# EAGLE board OLED_Adapter_15x (EAGLE 9.5.2), part 1 of 3
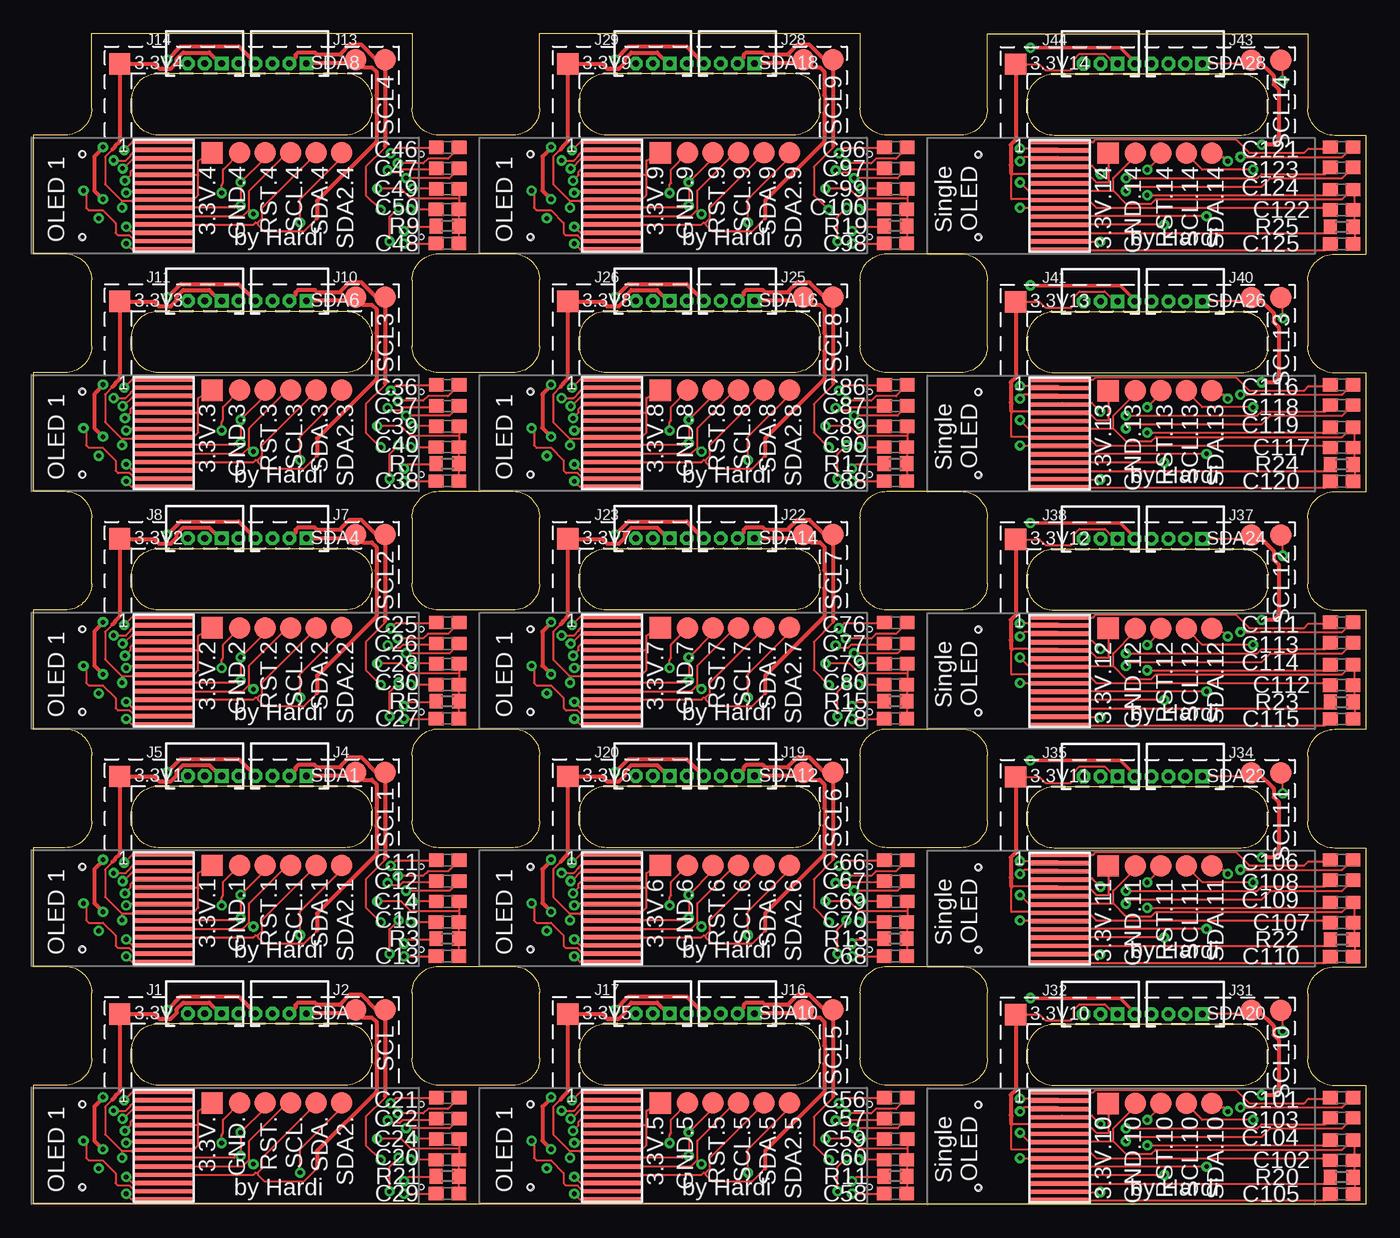
[diagram p0: board, top side]
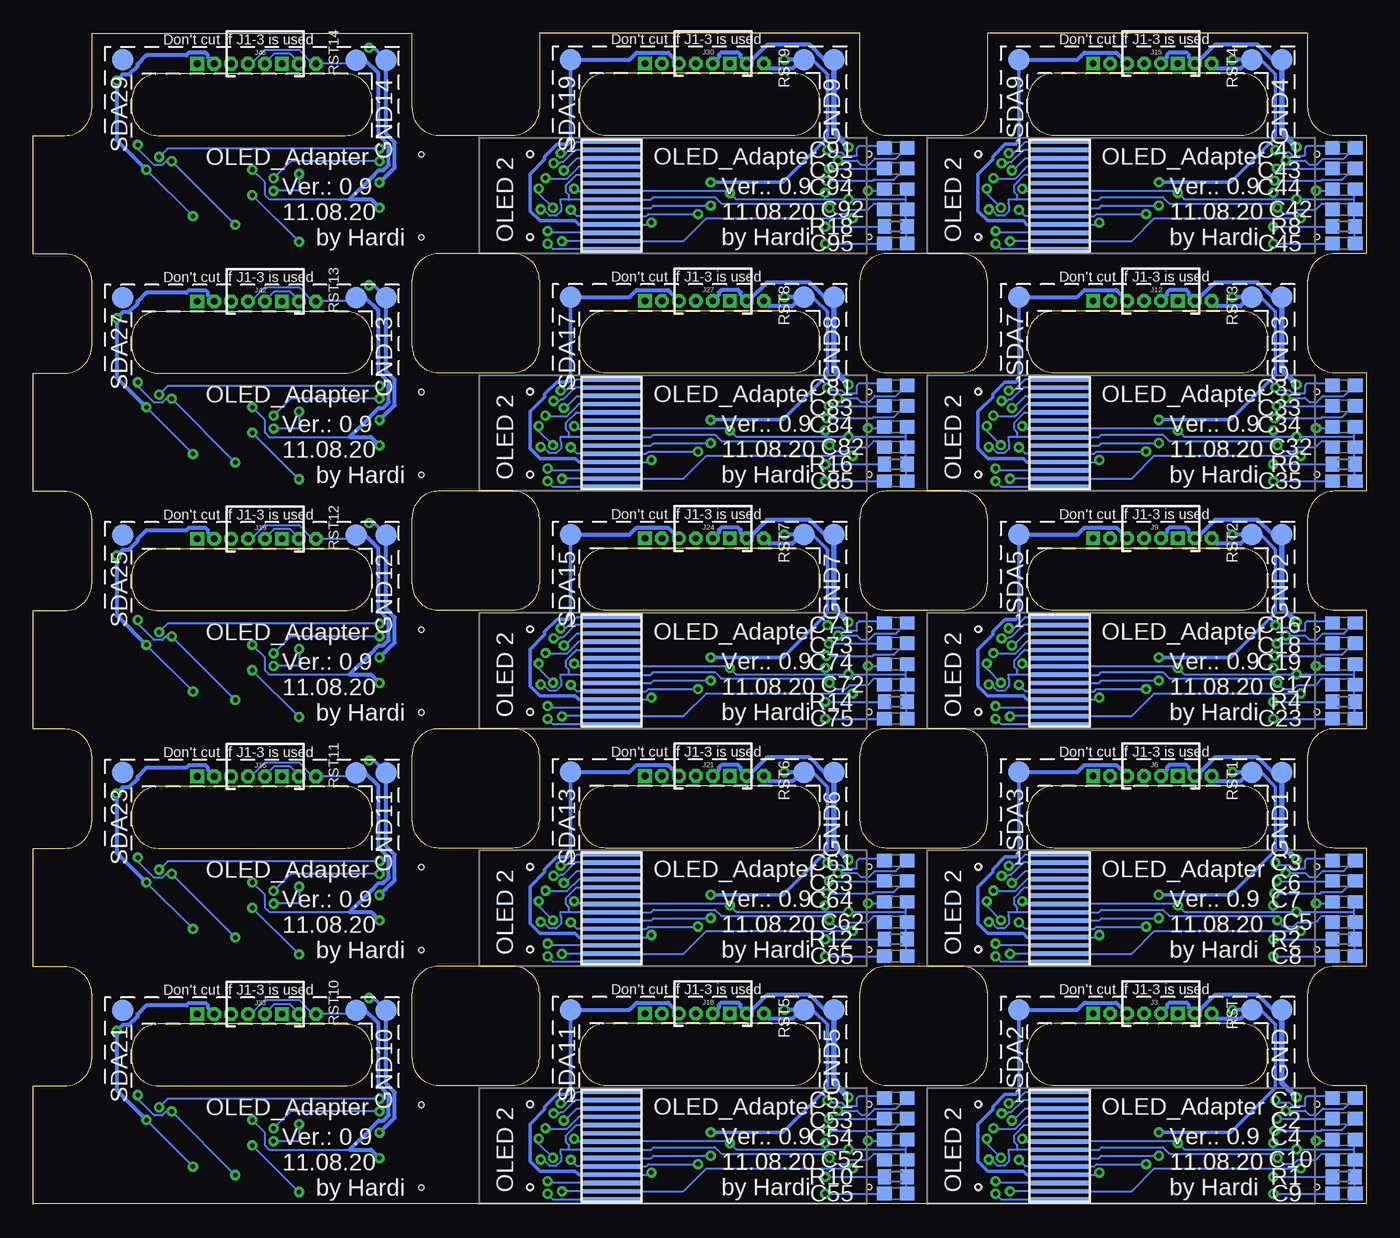
[diagram p1: board, bottom side, seen from below]

Size 99.82 x 87.7 mm. Coordinates in mm from the lower left corner, seen from the top.
Outline: 266 segments
Copper layers (1*16): Top 0.035mm / dielectric 1.5mm / Bottom 0.035mm
Design rules "default": minimum track width 6mil, minimum drill 0.35mm, track to track 6mil, track to pad 6mil, pad to pad 6mil, via to via 6mil, smd to smd 6mil, copper to edge 40mil, drill to drill 6mil, minimum pad ring 10mil, minimum via ring 8mil, stop-mask expansion 4mil, vias tented up to drill 0mil, thermal gap 10mil

## Footprints (pad centres in the part's own frame; a part is rotated, then mirrored left to right if it is on the bottom)
TP16SQ = smd 1.6 x 1.6: TP 0,0
C0603 = smd 1.1 x 1: 1 -0.85,0; 2 0.85,0
TP16R = smd 1.6 x 1.6: TP 0,0
OLED_FLEX_W_DISP = smd 4.5 x 0.32: 1 0,0; 2 0,-0.62; 3 0,-1.24; 4 0,-1.86; 5 0,-2.48; 6 0,-3.1; 7 0,-3.72; 8 0,-4.34; 9 0,-4.96; 10 0,-5.58; 11 0,-6.2; 12 0,-6.82; 13 0,-7.44; 14 0,-8.06 | hole 0.4: -6.1,-0.93; -6.1,-7.13
MINI = drill 0.5 pad 1.016 square: 1 -1.27,0 | drill 0.5 pad 1.016 octagon: 2 0,0; 3 1.27,0
R0603 = smd 1 x 1.1: 1 -0.85,0; 2 0.85,0

## Placement (x,y rotation side)
3.3V  3.3V  [TP16SQ]  6.46,14.25 0 top
3.3V1  3.3V  [TP16SQ]  6.46,32.04 0 top
3.3V2  3.3V  [TP16SQ]  6.46,49.84 0 top
3.3V3  3.3V  [TP16SQ]  6.46,67.63 0 top
3.3V4  3.3V  [TP16SQ]  6.46,85.42 0 top
3.3V5  3.3V  [TP16SQ]  40.02,14.25 0 top
3.3V6  3.3V  [TP16SQ]  40.02,32.04 0 top
3.3V7  3.3V  [TP16SQ]  40.02,49.84 0 top
3.3V8  3.3V  [TP16SQ]  40.02,67.63 0 top
3.3V9  3.3V  [TP16SQ]  40.02,85.42 0 top
3.3V10  3.3V  [TP16SQ]  73.56,14.22 0 top
3.3V11  3.3V  [TP16SQ]  73.56,32.01 0 top
3.3V12  3.3V  [TP16SQ]  73.56,49.8 0 top
3.3V13  3.3V  [TP16SQ]  73.56,67.6 0 top
3.3V14  3.3V  [TP16SQ]  73.56,85.39 0 top
3.3V.  TPTP16SQ  [TP16SQ]  13.39,7.59 0 top
3.3V.1  TPTP16SQ  [TP16SQ]  13.39,25.38 0 top
3.3V.2  TPTP16SQ  [TP16SQ]  13.39,43.18 0 top
3.3V.3  TPTP16SQ  [TP16SQ]  13.39,60.97 0 top
3.3V.4  TPTP16SQ  [TP16SQ]  13.39,78.76 0 top
3.3V.5  TPTP16SQ  [TP16SQ]  46.94,7.59 0 top
3.3V.6  TPTP16SQ  [TP16SQ]  46.94,25.38 0 top
3.3V.7  TPTP16SQ  [TP16SQ]  46.94,43.18 0 top
3.3V.8  TPTP16SQ  [TP16SQ]  46.94,60.97 0 top
3.3V.9  TPTP16SQ  [TP16SQ]  46.94,78.76 0 top
3.3V.10  TPTP16SQ  [TP16SQ]  80.48,7.56 0 top
3.3V.11  TPTP16SQ  [TP16SQ]  80.48,25.35 0 top
3.3V.12  TPTP16SQ  [TP16SQ]  80.48,43.14 0 top
3.3V.13  TPTP16SQ  [TP16SQ]  80.48,60.94 0 top
3.3V.14  TPTP16SQ  [TP16SQ]  80.48,78.73 0 top
C1  470nF  [C0603]  1.67,7.96 180 bottom
C2  470nF  [C0603]  1.67,6.43 180 bottom
C3  470nF  [C0603]  1.67,25.75 180 bottom
C4  2.2uF  [C0603]  1.67,4.86 180 bottom
C5  4.7uF  [C0603]  1.67,21.13 0 bottom
C6  470nF  [C0603]  1.67,24.23 180 bottom
C7  2.2uF  [C0603]  1.67,22.65 180 bottom
C8  4.7uF  [C0603]  1.67,18.59 0 bottom
C9  4.7uF  [C0603]  1.67,0.8 0 bottom
C10  4.7uF  [C0603]  1.67,3.34 0 bottom
C11  470nF  [C0603]  31.04,25.78 180 top
C12  470nF  [C0603]  31.04,24.21 180 top
C13  4.7uF  [C0603]  31.01,18.59 0 top
C14  2.2uF  [C0603]  31.04,22.69 180 top
C15  4.7uF  [C0603]  31.01,21.13 0 top
C16  470nF  [C0603]  1.67,43.54 180 bottom
C17  4.7uF  [C0603]  1.67,38.92 0 bottom
C18  470nF  [C0603]  1.67,42.02 180 bottom
C19  2.2uF  [C0603]  1.67,40.45 180 bottom
C20  4.7uF  [C0603]  31.01,3.34 0 top
C21  470nF  [C0603]  31.04,7.99 180 top
C22  470nF  [C0603]  31.04,6.42 180 top
C23  4.7uF  [C0603]  1.67,36.38 0 bottom
C24  2.2uF  [C0603]  31.04,4.9 180 top
C25  470nF  [C0603]  31.04,43.57 180 top
C26  470nF  [C0603]  31.04,42 180 top
C27  4.7uF  [C0603]  31.01,36.38 0 top
C28  2.2uF  [C0603]  31.04,40.48 180 top
C29  4.7uF  [C0603]  31.01,0.8 0 top
C30  4.7uF  [C0603]  31.01,38.92 0 top
C31  470nF  [C0603]  1.67,61.33 180 bottom
C32  4.7uF  [C0603]  1.67,56.71 0 bottom
C33  470nF  [C0603]  1.67,59.81 180 bottom
C34  2.2uF  [C0603]  1.67,58.24 180 bottom
C35  4.7uF  [C0603]  1.67,54.17 0 bottom
C36  470nF  [C0603]  31.04,61.36 180 top
C37  470nF  [C0603]  31.04,59.79 180 top
C38  4.7uF  [C0603]  31.01,54.17 0 top
C39  2.2uF  [C0603]  31.04,58.27 180 top
C40  4.7uF  [C0603]  31.01,56.71 0 top
C41  470nF  [C0603]  1.67,79.12 180 bottom
C42  4.7uF  [C0603]  1.67,74.5 0 bottom
C43  470nF  [C0603]  1.67,77.6 180 bottom
C44  2.2uF  [C0603]  1.67,76.03 180 bottom
C45  4.7uF  [C0603]  1.67,71.96 0 bottom
C46  470nF  [C0603]  31.04,79.16 180 top
C47  470nF  [C0603]  31.04,77.58 180 top
C48  4.7uF  [C0603]  31.01,71.96 0 top
C49  2.2uF  [C0603]  31.04,76.06 180 top
C50  4.7uF  [C0603]  31.01,74.5 0 top
C51  470nF  [C0603]  35.23,7.96 180 bottom
C52  4.7uF  [C0603]  35.23,3.34 0 bottom
C53  470nF  [C0603]  35.23,6.43 180 bottom
C54  2.2uF  [C0603]  35.23,4.86 180 bottom
C55  4.7uF  [C0603]  35.23,0.8 0 bottom
C56  470nF  [C0603]  64.6,7.99 180 top
C57  470nF  [C0603]  64.6,6.42 180 top
C58  4.7uF  [C0603]  64.57,0.8 0 top
C59  2.2uF  [C0603]  64.6,4.9 180 top
C60  4.7uF  [C0603]  64.57,3.34 0 top
C61  470nF  [C0603]  35.23,25.75 180 bottom
C62  4.7uF  [C0603]  35.23,21.13 0 bottom
C63  470nF  [C0603]  35.23,24.23 180 bottom
C64  2.2uF  [C0603]  35.23,22.65 180 bottom
C65  4.7uF  [C0603]  35.23,18.59 0 bottom
C66  470nF  [C0603]  64.6,25.78 180 top
C67  470nF  [C0603]  64.6,24.21 180 top
C68  4.7uF  [C0603]  64.57,18.59 0 top
C69  2.2uF  [C0603]  64.6,22.69 180 top
C70  4.7uF  [C0603]  64.57,21.13 0 top
C71  470nF  [C0603]  35.23,43.54 180 bottom
C72  4.7uF  [C0603]  35.23,38.92 0 bottom
C73  470nF  [C0603]  35.23,42.02 180 bottom
C74  2.2uF  [C0603]  35.23,40.45 180 bottom
C75  4.7uF  [C0603]  35.23,36.38 0 bottom
C76  470nF  [C0603]  64.6,43.57 180 top
C77  470nF  [C0603]  64.6,42 180 top
C78  4.7uF  [C0603]  64.57,36.38 0 top
C79  2.2uF  [C0603]  64.6,40.48 180 top
C80  4.7uF  [C0603]  64.57,38.92 0 top
C81  470nF  [C0603]  35.23,61.33 180 bottom
C82  4.7uF  [C0603]  35.23,56.71 0 bottom
C83  470nF  [C0603]  35.23,59.81 180 bottom
C84  2.2uF  [C0603]  35.23,58.24 180 bottom
C85  4.7uF  [C0603]  35.23,54.17 0 bottom
C86  470nF  [C0603]  64.6,61.36 180 top
C87  470nF  [C0603]  64.6,59.79 180 top
C88  4.7uF  [C0603]  64.57,54.17 0 top
C89  2.2uF  [C0603]  64.6,58.27 180 top
C90  4.7uF  [C0603]  64.57,56.71 0 top
C91  470nF  [C0603]  35.23,79.12 180 bottom
C92  4.7uF  [C0603]  35.23,74.5 0 bottom
C93  470nF  [C0603]  35.23,77.6 180 bottom
C94  2.2uF  [C0603]  35.23,76.03 180 bottom
C95  4.7uF  [C0603]  35.23,71.96 0 bottom
C96  470nF  [C0603]  64.6,79.16 180 top
C97  470nF  [C0603]  64.6,77.58 180 top
C98  4.7uF  [C0603]  64.57,71.96 0 top
C99  2.2uF  [C0603]  64.6,76.06 180 top
C100  4.7uF  [C0603]  64.57,74.5 0 top
C101  470nF  [C0603]  97.98,8 180 top
C102  4.7uF  [C0603]  97.98,3.3 0 top
C103  470nF  [C0603]  97.98,6.48 180 top
C104  2.2uF  [C0603]  97.98,4.83 180 top
C105  4.7uF  [C0603]  97.98,0.76 0 top
C106  470nF  [C0603]  97.98,25.79 180 top
C107  4.7uF  [C0603]  97.98,21.1 0 top
C108  470nF  [C0603]  97.98,24.27 180 top
C109  2.2uF  [C0603]  97.98,22.62 180 top
C110  4.7uF  [C0603]  97.98,18.56 0 top
C111  470nF  [C0603]  97.98,43.59 180 top
C112  4.7uF  [C0603]  97.98,38.89 0 top
C113  470nF  [C0603]  97.98,42.06 180 top
C114  2.2uF  [C0603]  97.98,40.41 180 top
C115  4.7uF  [C0603]  97.98,36.35 0 top
C116  470nF  [C0603]  97.98,61.38 180 top
C117  4.7uF  [C0603]  97.98,56.68 0 top
C118  470nF  [C0603]  97.98,59.86 180 top
C119  2.2uF  [C0603]  97.98,58.21 180 top
C120  4.7uF  [C0603]  97.98,54.14 0 top
C121  470nF  [C0603]  97.98,79.17 180 top
C122  4.7uF  [C0603]  97.98,74.48 0 top
C123  470nF  [C0603]  97.98,77.65 180 top
C124  2.2uF  [C0603]  97.98,76 180 top
C125  4.7uF  [C0603]  97.98,71.94 0 top
GND  GND  [TP16R]  6.3,14.57 0 bottom
GND1  GND  [TP16R]  6.3,32.36 0 bottom
GND2  GND  [TP16R]  6.3,50.15 0 bottom
GND3  GND  [TP16R]  6.3,67.95 0 bottom
GND4  GND  [TP16R]  6.3,85.74 0 bottom
GND5  GND  [TP16R]  39.86,14.57 0 bottom
GND6  GND  [TP16R]  39.86,32.36 0 bottom
GND7  GND  [TP16R]  39.86,50.15 0 bottom
GND8  GND  [TP16R]  39.86,67.95 0 bottom
GND9  GND  [TP16R]  39.86,85.74 0 bottom
GND10  GND  [TP16R]  73.4,14.53 0 bottom
GND11  GND  [TP16R]  73.4,32.33 0 bottom
GND12  GND  [TP16R]  73.4,50.12 0 bottom
GND13  GND  [TP16R]  73.4,67.91 0 bottom
GND14  GND  [TP16R]  73.4,85.71 0 bottom
GND.  TPTP16R  [TP16R]  15.45,7.59 0 top
GND.1  TPTP16R  [TP16R]  15.45,25.38 0 top
GND.2  TPTP16R  [TP16R]  15.45,43.18 0 top
GND.3  TPTP16R  [TP16R]  15.45,60.97 0 top
GND.4  TPTP16R  [TP16R]  15.45,78.76 0 top
GND.5  TPTP16R  [TP16R]  49.01,7.59 0 top
GND.6  TPTP16R  [TP16R]  49.01,25.38 0 top
GND.7  TPTP16R  [TP16R]  49.01,43.18 0 top
GND.8  TPTP16R  [TP16R]  49.01,60.97 0 top
GND.9  TPTP16R  [TP16R]  49.01,78.76 0 top
GND.10  TPTP16R  [TP16R]  82.55,7.56 0 top
GND.11  TPTP16R  [TP16R]  82.55,25.35 0 top
GND.12  TPTP16R  [TP16R]  82.55,43.14 0 top
GND.13  TPTP16R  [TP16R]  82.55,60.94 0 top
GND.14  TPTP16R  [TP16R]  82.55,78.73 0 top
IC1  OLED_FLEXW_DISP  [OLED_FLEX_W_DISP]  9.77,8.42 0 top
IC2  OLED_FLEXW_DISP  [OLED_FLEX_W_DISP]  22.95,8.42 0 bottom
IC3  OLED_FLEXW_DISP  [OLED_FLEX_W_DISP]  9.77,26.21 0 top
IC4  OLED_FLEXW_DISP  [OLED_FLEX_W_DISP]  22.95,26.21 0 bottom
IC5  OLED_FLEXW_DISP  [OLED_FLEX_W_DISP]  9.77,44 0 top
IC6  OLED_FLEXW_DISP  [OLED_FLEX_W_DISP]  22.95,44 0 bottom
IC7  OLED_FLEXW_DISP  [OLED_FLEX_W_DISP]  9.77,61.79 0 top
IC8  OLED_FLEXW_DISP  [OLED_FLEX_W_DISP]  22.95,61.79 0 bottom
IC9  OLED_FLEXW_DISP  [OLED_FLEX_W_DISP]  9.77,79.58 0 top
IC10  OLED_FLEXW_DISP  [OLED_FLEX_W_DISP]  22.95,79.58 0 bottom
IC11  OLED_FLEXW_DISP  [OLED_FLEX_W_DISP]  43.32,8.42 0 top
IC12  OLED_FLEXW_DISP  [OLED_FLEX_W_DISP]  56.51,8.42 0 bottom
IC13  OLED_FLEXW_DISP  [OLED_FLEX_W_DISP]  43.32,26.21 0 top
IC14  OLED_FLEXW_DISP  [OLED_FLEX_W_DISP]  56.51,26.21 0 bottom
IC15  OLED_FLEXW_DISP  [OLED_FLEX_W_DISP]  43.32,44 0 top
IC16  OLED_FLEXW_DISP  [OLED_FLEX_W_DISP]  56.51,44 0 bottom
IC17  OLED_FLEXW_DISP  [OLED_FLEX_W_DISP]  43.32,61.79 0 top
IC18  OLED_FLEXW_DISP  [OLED_FLEX_W_DISP]  56.51,61.79 0 bottom
IC19  OLED_FLEXW_DISP  [OLED_FLEX_W_DISP]  43.32,79.58 0 top
IC20  OLED_FLEXW_DISP  [OLED_FLEX_W_DISP]  56.51,79.58 0 bottom
IC21  OLED_FLEXW_DISP  [OLED_FLEX_W_DISP]  76.86,8.38 0 top
IC22  OLED_FLEXW_DISP  [OLED_FLEX_W_DISP]  76.86,26.18 0 top
IC23  OLED_FLEXW_DISP  [OLED_FLEX_W_DISP]  76.86,43.97 0 top
IC24  OLED_FLEXW_DISP  [OLED_FLEX_W_DISP]  76.86,61.76 0 top
IC25  OLED_FLEXW_DISP  [OLED_FLEX_W_DISP]  76.86,79.56 0 top
J1  SV3  [MINI]  12.83,14.29 180 top
J2  SV3  [MINI]  19.18,14.29 180 top
J3  SV3  [MINI]  15.37,14.29 180 bottom
J4  SV3  [MINI]  19.18,32.08 180 top
J5  SV3  [MINI]  12.83,32.08 180 top
J6  SV3  [MINI]  15.37,32.08 180 bottom
J7  SV3  [MINI]  19.18,49.88 180 top
J8  SV3  [MINI]  12.83,49.88 180 top
J9  SV3  [MINI]  15.37,49.88 180 bottom
J10  SV3  [MINI]  19.18,67.67 180 top
J11  SV3  [MINI]  12.83,67.67 180 top
J12  SV3  [MINI]  15.37,67.67 180 bottom
J13  SV3  [MINI]  19.18,85.46 180 top
J14  SV3  [MINI]  12.83,85.46 180 top
J15  SV3  [MINI]  15.37,85.46 180 bottom
J16  SV3  [MINI]  52.74,14.29 180 top
J17  SV3  [MINI]  46.39,14.29 180 top
J18  SV3  [MINI]  48.93,14.29 180 bottom
J19  SV3  [MINI]  52.74,32.08 180 top
J20  SV3  [MINI]  46.39,32.08 180 top
J21  SV3  [MINI]  48.93,32.08 180 bottom
J22  SV3  [MINI]  52.74,49.88 180 top
J23  SV3  [MINI]  46.39,49.88 180 top
J24  SV3  [MINI]  48.93,49.88 180 bottom
J25  SV3  [MINI]  52.74,67.67 180 top
J26  SV3  [MINI]  46.39,67.67 180 top
J27  SV3  [MINI]  48.93,67.67 180 bottom
J28  SV3  [MINI]  52.74,85.46 180 top
J29  SV3  [MINI]  46.39,85.46 180 top
J30  SV3  [MINI]  48.93,85.46 180 bottom
J31  SV3  [MINI]  86.28,14.26 180 top
J32  SV3  [MINI]  79.93,14.26 180 top
J33  SV3  [MINI]  82.47,14.26 180 bottom
J34  SV3  [MINI]  86.28,32.05 180 top
J35  SV3  [MINI]  79.93,32.05 180 top
J36  SV3  [MINI]  82.47,32.05 180 bottom
J37  SV3  [MINI]  86.28,49.84 180 top
J38  SV3  [MINI]  79.93,49.84 180 top
J39  SV3  [MINI]  82.47,49.84 180 bottom
J40  SV3  [MINI]  86.28,67.64 180 top
J41  SV3  [MINI]  79.93,67.64 180 top
J42  SV3  [MINI]  82.47,67.64 180 bottom
J43  SV3  [MINI]  86.28,85.43 180 top
J44  SV3  [MINI]  79.93,85.43 180 top
J45  SV3  [MINI]  82.47,85.43 180 bottom
R1  560K  [R0603]  1.67,2.07 180 bottom
R2  560K  [R0603]  1.67,19.86 180 bottom
R3  560K  [R0603]  31.01,19.89 180 top
R4  560K  [R0603]  1.67,37.65 180 bottom
R5  560K  [R0603]  31.01,37.68 180 top
R6  560K  [R0603]  1.67,55.44 180 bottom
R7  560K  [R0603]  31.01,55.48 180 top
R8  560K  [R0603]  1.67,73.23 180 bottom
R9  560K  [R0603]  31.01,73.27 180 top
R10  560K  [R0603]  35.23,2.07 180 bottom
R11  560K  [R0603]  64.57,2.1 180 top
R12  560K  [R0603]  35.23,19.86 180 bottom
R13  560K  [R0603]  64.57,19.89 180 top
R14  560K  [R0603]  35.23,37.65 180 bottom
R15  560K  [R0603]  64.57,37.68 180 top
R16  560K  [R0603]  35.23,55.44 180 bottom
R17  560K  [R0603]  64.57,55.48 180 top
R18  560K  [R0603]  35.23,73.23 180 bottom
R19  560K  [R0603]  64.57,73.27 180 top
R20  560K  [R0603]  97.98,2.03 180 top
R21  560K  [R0603]  31.01,2.1 180 top
R22  560K  [R0603]  97.98,19.83 180 top
R23  560K  [R0603]  97.98,37.62 180 top
R24  560K  [R0603]  97.98,55.41 180 top
R25  560K  [R0603]  97.98,73.21 180 top
RST  RST  [TP16R]  8.56,14.57 0 bottom
RST1  RST  [TP16R]  8.56,32.36 0 bottom
RST2  RST  [TP16R]  8.56,50.15 0 bottom
RST3  RST  [TP16R]  8.56,67.95 0 bottom
RST4  RST  [TP16R]  8.56,85.74 0 bottom
RST5  RST  [TP16R]  42.12,14.57 0 bottom
RST6  RST  [TP16R]  42.12,32.36 0 bottom
RST7  RST  [TP16R]  42.12,50.15 0 bottom
RST8  RST  [TP16R]  42.12,67.95 0 bottom
RST9  RST  [TP16R]  42.12,85.74 0 bottom
RST10  RST  [TP16R]  75.66,14.53 0 bottom
RST11  RST  [TP16R]  75.66,32.33 0 bottom
RST12  RST  [TP16R]  75.66,50.12 0 bottom
RST13  RST  [TP16R]  75.66,67.91 0 bottom
RST14  RST  [TP16R]  75.66,85.71 0 bottom
RST.  TPTP16R  [TP16R]  17.35,7.59 0 top
RST.1  TPTP16R  [TP16R]  17.35,25.38 0 top
RST.2  TPTP16R  [TP16R]  17.35,43.18 0 top
RST.3  TPTP16R  [TP16R]  17.35,60.97 0 top
RST.4  TPTP16R  [TP16R]  17.35,78.76 0 top
RST.5  TPTP16R  [TP16R]  50.91,7.59 0 top
RST.6  TPTP16R  [TP16R]  50.91,25.38 0 top
RST.7  TPTP16R  [TP16R]  50.91,43.18 0 top
RST.8  TPTP16R  [TP16R]  50.91,60.97 0 top
RST.9  TPTP16R  [TP16R]  50.91,78.76 0 top
RST.10  TPTP16R  [TP16R]  84.45,7.56 0 top
RST.11  TPTP16R  [TP16R]  84.45,25.35 0 top
RST.12  TPTP16R  [TP16R]  84.45,43.14 0 top
RST.13  TPTP16R  [TP16R]  84.45,60.94 0 top
RST.14  TPTP16R  [TP16R]  84.45,78.73 0 top
SCL  SCL  [TP16R]  26.34,14.57 0 top
SCL1  SCL  [TP16R]  26.34,32.36 0 top
SCL2  SCL  [TP16R]  26.34,50.15 0 top
SCL3  SCL  [TP16R]  26.34,67.95 0 top
SCL4  SCL  [TP16R]  26.34,85.74 0 top
SCL5  SCL  [TP16R]  59.9,14.57 0 top
SCL6  SCL  [TP16R]  59.9,32.36 0 top
SCL7  SCL  [TP16R]  59.9,50.15 0 top
SCL8  SCL  [TP16R]  59.9,67.95 0 top
SCL9  SCL  [TP16R]  59.9,85.74 0 top
SCL10  SCL  [TP16R]  93.44,14.53 0 top
SCL11  SCL  [TP16R]  93.44,32.33 0 top
SCL12  SCL  [TP16R]  93.44,50.12 0 top
SCL13  SCL  [TP16R]  93.44,67.91 0 top
SCL14  SCL  [TP16R]  93.44,85.71 0 top
SCL.  TPTP16R  [TP16R]  19.26,7.59 0 top
SCL.1  TPTP16R  [TP16R]  19.26,25.38 0 top
SCL.2  TPTP16R  [TP16R]  19.26,43.18 0 top
SCL.3  TPTP16R  [TP16R]  19.26,60.97 0 top
SCL.4  TPTP16R  [TP16R]  19.26,78.76 0 top
SCL.5  TPTP16R  [TP16R]  52.81,7.59 0 top
SCL.6  TPTP16R  [TP16R]  52.81,25.38 0 top
SCL.7  TPTP16R  [TP16R]  52.81,43.18 0 top
SCL.8  TPTP16R  [TP16R]  52.81,60.97 0 top
SCL.9  TPTP16R  [TP16R]  52.81,78.76 0 top
SCL.10  TPTP16R  [TP16R]  86.35,7.56 0 top
SCL.11  TPTP16R  [TP16R]  86.35,25.35 0 top
SCL.12  TPTP16R  [TP16R]  86.35,43.14 0 top
SCL.13  TPTP16R  [TP16R]  86.35,60.94 0 top
SCL.14  TPTP16R  [TP16R]  86.35,78.73 0 top
SDA  SDA  [TP16R]  24.12,14.57 0 top
SDA1  SDA  [TP16R]  24.12,32.36 0 top
SDA2  SDA2  [TP16R]  26.02,14.58 0 bottom
SDA2.  TPTP16R  [TP16R]  23.08,7.61 0 top
SDA2.1  TPTP16R  [TP16R]  23.08,25.4 0 top
SDA2.2  TPTP16R  [TP16R]  23.08,43.19 0 top
SDA2.3  TPTP16R  [TP16R]  23.08,60.98 0 top
SDA2.4  TPTP16R  [TP16R]  23.08,78.77 0 top
SDA2.5  TPTP16R  [TP16R]  56.64,7.61 0 top
SDA2.6  TPTP16R  [TP16R]  56.64,25.4 0 top
SDA2.7  TPTP16R  [TP16R]  56.64,43.19 0 top
SDA2.8  TPTP16R  [TP16R]  56.64,60.98 0 top
SDA2.9  TPTP16R  [TP16R]  56.64,78.77 0 top
SDA3  SDA2  [TP16R]  26.02,32.37 0 bottom
SDA4  SDA  [TP16R]  24.12,50.15 0 top
SDA5  SDA2  [TP16R]  26.02,50.16 0 bottom
SDA6  SDA  [TP16R]  24.12,67.95 0 top
SDA7  SDA2  [TP16R]  26.02,67.95 0 bottom
SDA8  SDA  [TP16R]  24.12,85.74 0 top
SDA9  SDA2  [TP16R]  26.02,85.74 0 bottom
SDA10  SDA  [TP16R]  57.68,14.57 0 top
SDA11  SDA2  [TP16R]  59.58,14.58 0 bottom
SDA12  SDA  [TP16R]  57.68,32.36 0 top
SDA13  SDA2  [TP16R]  59.58,32.37 0 bottom
SDA14  SDA  [TP16R]  57.68,50.15 0 top
SDA15  SDA2  [TP16R]  59.58,50.16 0 bottom
SDA16  SDA  [TP16R]  57.68,67.95 0 top
SDA17  SDA2  [TP16R]  59.58,67.95 0 bottom
SDA18  SDA  [TP16R]  57.68,85.74 0 top
SDA19  SDA2  [TP16R]  59.58,85.74 0 bottom
SDA20  SDA  [TP16R]  91.21,14.53 0 top
SDA21  SDA2  [TP16R]  93.12,14.54 0 bottom
SDA22  SDA  [TP16R]  91.21,32.33 0 top
SDA23  SDA2  [TP16R]  93.12,32.34 0 bottom
SDA24  SDA  [TP16R]  91.21,50.12 0 top
SDA25  SDA2  [TP16R]  93.12,50.13 0 bottom
SDA26  SDA  [TP16R]  91.21,67.91 0 top
SDA27  SDA2  [TP16R]  93.12,67.92 0 bottom
SDA28  SDA  [TP16R]  91.21,85.71 0 top
SDA29  SDA2  [TP16R]  93.12,85.72 0 bottom
SDA.  TPTP16R  [TP16R]  21.16,7.59 0 top
SDA.1  TPTP16R  [TP16R]  21.16,25.38 0 top
SDA.2  TPTP16R  [TP16R]  21.16,43.18 0 top
SDA.3  TPTP16R  [TP16R]  21.16,60.97 0 top
SDA.4  TPTP16R  [TP16R]  21.16,78.76 0 top
SDA.5  TPTP16R  [TP16R]  54.72,7.59 0 top
SDA.6  TPTP16R  [TP16R]  54.72,25.38 0 top
SDA.7  TPTP16R  [TP16R]  54.72,43.18 0 top
SDA.8  TPTP16R  [TP16R]  54.72,60.97 0 top
SDA.9  TPTP16R  [TP16R]  54.72,78.76 0 top
SDA.10  TPTP16R  [TP16R]  88.26,7.56 0 top
SDA.11  TPTP16R  [TP16R]  88.26,25.35 0 top
SDA.12  TPTP16R  [TP16R]  88.26,43.14 0 top
SDA.13  TPTP16R  [TP16R]  88.26,60.94 0 top
SDA.14  TPTP16R  [TP16R]  88.26,78.73 0 top

## Library data of the parts
3.3V 3.3V1-3.3V14 3.3V. 3.3V.1-3.3V.14 GND GND1-GND14 GND. GND.1-GND.14 RST RST1-RST14 RST. RST.1-RST.14 SCL SCL1-SCL14 SCL. SCL.1-SCL.14 SDA SDA1 SDA2 SDA2. SDA2.1-SDA2.9 SDA3-SDA29 SDA. SDA.1-SDA.14 = testpad
C1-C125 = resistor
IC1-IC25 = OLED_Flex
J1-J45 = SparkFun-Connectors
R1-R25 = rcl; SPICEPREFIX: R

## Nets
3.3V: 3.3V..TP 3.3V.TP C10.1 C20.1 IC1.5 IC1.8 IC2.5 IC2.8 J1.1 J3.1
3.3V1: 3.3V1.TP 3.3V.1.TP C5.1 C15.1 IC3.5 IC3.8 IC4.5 IC4.8 J5.1 J6.1
3.3V2: 3.3V2.TP 3.3V.2.TP C17.1 C30.1 IC5.5 IC5.8 IC6.5 IC6.8 J8.1 J9.1
3.3V3: 3.3V3.TP 3.3V.3.TP C32.1 C40.1 IC7.5 IC7.8 IC8.5 IC8.8 J11.1 J12.1
3.3V4: 3.3V4.TP 3.3V.4.TP C42.1 C50.1 IC9.5 IC9.8 IC10.5 IC10.8 J14.1 J15.1
3.3V5: 3.3V5.TP 3.3V.5.TP C52.1 C60.1 IC11.5 IC11.8 IC12.5 IC12.8 J17.1 J18.1
3.3V6: 3.3V6.TP 3.3V.6.TP C62.1 C70.1 IC13.5 IC13.8 IC14.5 IC14.8 J20.1 J21.1
3.3V7: 3.3V7.TP 3.3V.7.TP C72.1 C80.1 IC15.5 IC15.8 IC16.5 IC16.8 J23.1 J24.1
3.3V8: 3.3V8.TP 3.3V.8.TP C82.1 C90.1 IC17.5 IC17.8 IC18.5 IC18.8 J26.1 J27.1
3.3V9: 3.3V9.TP 3.3V.9.TP C92.1 C100.1 IC19.5 IC19.8 IC20.5 IC20.8 J29.1 J30.1
3.3V10: 3.3V10.TP 3.3V.10.TP C102.1 IC21.5 IC21.8 J32.1 J33.1
3.3V11: 3.3V11.TP 3.3V.11.TP C107.1 IC22.5 IC22.8 J35.1 J36.1
3.3V12: 3.3V12.TP 3.3V.12.TP C112.1 IC23.5 IC23.8 J38.1 J39.1
3.3V13: 3.3V13.TP 3.3V.13.TP C117.1 IC24.5 IC24.8 J41.1 J42.1
3.3V14: 3.3V14.TP 3.3V.14.TP C122.1 IC25.5 IC25.8 J44.1 J45.1
GND: C4.1 C9.2 C10.2 C20.2 C24.1 C29.2 GND..TP GND.TP IC1.7 IC2.7 J1.2 J3.2 R1.1 R21.1
GND1: C5.2 C7.1 C8.2 C13.2 C14.1 C15.2 GND1.TP GND.1.TP IC3.7 IC4.7 J5.2 J6.2 R2.1 R3.1
GND2: C17.2 C19.1 C23.2 C27.2 C28.1 C30.2 GND2.TP GND.2.TP IC5.7 IC6.7 J8.2 J9.2 R4.1 R5.1
GND3: C32.2 C34.1 C35.2 C38.2 C39.1 C40.2 GND3.TP GND.3.TP IC7.7 IC8.7 J11.2 J12.2 R6.1 R7.1
GND4: C42.2 C44.1 C45.2 C48.2 C49.1 C50.2 GND4.TP GND.4.TP IC9.7 IC10.7 J14.2 J15.2 R8.1 R9.1
GND5: C52.2 C54.1 C55.2 C58.2 C59.1 C60.2 GND5.TP GND.5.TP IC11.7 IC12.7 J17.2 J18.2 R10.1 R11.1
GND6: C62.2 C64.1 C65.2 C68.2 C69.1 C70.2 GND6.TP GND.6.TP IC13.7 IC14.7 J20.2 J21.2 R12.1 R13.1
GND7: C72.2 C74.1 C75.2 C78.2 C79.1 C80.2 GND7.TP GND.7.TP IC15.7 IC16.7 J23.2 J24.2 R14.1 R15.1
GND8: C82.2 C84.1 C85.2 C88.2 C89.1 C90.2 GND8.TP GND.8.TP IC17.7 IC18.7 J26.2 J27.2 R16.1 R17.1
GND9: C92.2 C94.1 C95.2 C98.2 C99.1 C100.2 GND9.TP GND.9.TP IC19.7 IC20.7 J29.2 J30.2 R18.1 R19.1
GND10: C102.2 C104.1 C105.2 GND10.TP GND.10.TP IC21.7 J32.2 J33.2 R20.1
GND11: C107.2 C109.1 C110.2 GND11.TP GND.11.TP IC22.7 J35.2 J36.2 R22.1
GND12: C112.2 C114.1 C115.2 GND12.TP GND.12.TP IC23.7 J38.2 J39.2 R23.1
GND13: C117.2 C119.1 C120.2 GND13.TP GND.13.TP IC24.7 J41.2 J42.2 R24.1
GND14: C122.2 C124.1 C125.2 GND14.TP GND.14.TP IC25.7 J44.2 J45.2 R25.1
N$1: IC1.12 R1.2
N$2: C21.2 IC2.1
N$3: C1.2 IC1.1
N$4: C1.1 IC1.2
N$5: C2.2 IC1.3
N$6: C2.1 IC1.4
N$7: C9.1 IC1.14
N$8: C4.2 IC1.13
N$9: C21.1 IC2.2
N$10: C22.2 IC2.3
N$11: C22.1 IC2.4
N$12: IC2.12 R21.2
N$13: C29.1 IC2.14
N$14: C24.2 IC2.13
N$15: C3.2 IC3.1
N$16: C3.1 IC3.2
N$17: C6.2 IC3.3
N$18: C6.1 IC3.4
N$19: IC3.12 R2.2
N$20: C8.1 IC3.14
N$21: C7.2 IC3.13
N$22: C11.2 IC4.1
N$23: C11.1 IC4.2
N$24: C12.2 IC4.3
N$25: C12.1 IC4.4
N$26: IC4.12 R3.2
N$27: C13.1 IC4.14
N$28: C14.2 IC4.13
N$29: C16.2 IC5.1
N$30: C16.1 IC5.2
N$31: C18.2 IC5.3
N$32: C18.1 IC5.4
N$33: IC5.12 R4.2
N$34: C23.1 IC5.14
N$35: C19.2 IC5.13
N$36: C25.2 IC6.1
N$37: C25.1 IC6.2
N$38: C26.2 IC6.3
N$39: C26.1 IC6.4
N$40: IC6.12 R5.2
N$41: C27.1 IC6.14
N$42: C28.2 IC6.13
N$43: C31.2 IC7.1
N$44: C31.1 IC7.2
N$45: C33.2 IC7.3
N$46: C33.1 IC7.4
N$47: IC7.12 R6.2
N$48: C35.1 IC7.14
N$49: C34.2 IC7.13
N$50: C36.2 IC8.1
N$51: C36.1 IC8.2
N$52: C37.2 IC8.3
N$53: C37.1 IC8.4
N$54: IC8.12 R7.2
N$55: C38.1 IC8.14
N$56: C39.2 IC8.13
N$57: C41.2 IC9.1
N$58: C41.1 IC9.2
N$59: C43.2 IC9.3
N$60: C43.1 IC9.4
N$61: IC9.12 R8.2
N$62: C45.1 IC9.14
N$63: C44.2 IC9.13
N$64: C46.2 IC10.1
N$65: C46.1 IC10.2
N$66: C47.2 IC10.3
N$67: C47.1 IC10.4
N$68: IC10.12 R9.2
N$69: C48.1 IC10.14
N$70: C49.2 IC10.13
N$71: C51.2 IC11.1
N$72: C51.1 IC11.2
N$73: C53.2 IC11.3
N$74: C53.1 IC11.4
N$75: IC11.12 R10.2
N$76: C55.1 IC11.14
N$77: C54.2 IC11.13
N$78: C56.2 IC12.1
N$79: C56.1 IC12.2
N$80: C57.2 IC12.3
N$81: C57.1 IC12.4
N$82: IC12.12 R11.2
N$83: C58.1 IC12.14
N$84: C59.2 IC12.13
N$85: C61.2 IC13.1
N$86: C61.1 IC13.2
N$87: C63.2 IC13.3
N$88: C63.1 IC13.4
N$89: IC13.12 R12.2
N$90: C65.1 IC13.14
N$91: C64.2 IC13.13
N$92: C66.2 IC14.1
N$93: C66.1 IC14.2
N$94: C67.2 IC14.3
N$95: C67.1 IC14.4
N$96: IC14.12 R13.2
N$97: C68.1 IC14.14
N$98: C69.2 IC14.13
N$99: C71.2 IC15.1
N$100: C71.1 IC15.2
N$101: C73.2 IC15.3
N$102: C73.1 IC15.4
N$103: IC15.12 R14.2
N$104: C75.1 IC15.14
N$105: C74.2 IC15.13
N$106: C76.2 IC16.1
N$107: C76.1 IC16.2
N$108: C77.2 IC16.3
N$109: C77.1 IC16.4
N$110: IC16.12 R15.2
N$111: C78.1 IC16.14
N$112: C79.2 IC16.13
N$113: C81.2 IC17.1
N$114: C81.1 IC17.2
N$115: C83.2 IC17.3
N$116: C83.1 IC17.4
N$117: IC17.12 R16.2
N$118: C85.1 IC17.14
N$119: C84.2 IC17.13
N$120: C86.2 IC18.1
N$121: C86.1 IC18.2
N$122: C87.2 IC18.3
N$123: C87.1 IC18.4
N$124: IC18.12 R17.2
N$125: C88.1 IC18.14
N$126: C89.2 IC18.13
N$127: C91.2 IC19.1
N$128: C91.1 IC19.2
N$129: C93.2 IC19.3
N$130: C93.1 IC19.4
N$131: IC19.12 R18.2
N$132: C95.1 IC19.14
N$133: C94.2 IC19.13
N$134: C96.2 IC20.1
N$135: C96.1 IC20.2
N$136: C97.2 IC20.3
N$137: C97.1 IC20.4
N$138: IC20.12 R19.2
N$139: C98.1 IC20.14
N$140: C99.2 IC20.13
N$141: C101.2 IC21.1
N$142: C101.1 IC21.2
N$143: C103.2 IC21.3
N$144: C103.1 IC21.4
N$145: IC21.12 R20.2
N$146: C105.1 IC21.14
N$147: C104.2 IC21.13
N$148: C106.2 IC22.1
N$149: C106.1 IC22.2
N$150: C108.2 IC22.3
N$151: C108.1 IC22.4
N$152: IC22.12 R22.2
N$153: C110.1 IC22.14
N$154: C109.2 IC22.13
N$155: C111.2 IC23.1
N$156: C111.1 IC23.2
N$157: C113.2 IC23.3
N$158: C113.1 IC23.4
N$159: IC23.12 R23.2
N$160: C115.1 IC23.14
N$161: C114.2 IC23.13
N$162: C116.2 IC24.1
N$163: C116.1 IC24.2
N$164: C118.2 IC24.3
N$165: C118.1 IC24.4
N$166: IC24.12 R24.2
N$167: C120.1 IC24.14
N$168: C119.2 IC24.13
N$169: C121.2 IC25.1
N$170: C121.1 IC25.2
N$171: C123.2 IC25.3
N$172: C123.1 IC25.4
N$173: IC25.12 R25.2
N$174: C125.1 IC25.14
N$175: C124.2 IC25.13
RES#: IC1.9 IC2.9 J1.3 J3.3 RST..TP RST.TP
RES#1: IC3.9 IC4.9 J5.3 J6.3 RST1.TP RST.1.TP
RES#2: IC5.9 IC6.9 J8.3 J9.3 RST2.TP RST.2.TP
RES#3: IC7.9 IC8.9 J11.3 J12.3 RST3.TP RST.3.TP
RES#4: IC9.9 IC10.9 J14.3 J15.3 RST4.TP RST.4.TP
RES#5: IC11.9 IC12.9 J17.3 J18.3 RST5.TP RST.5.TP
RES#6: IC13.9 IC14.9 J20.3 J21.3 RST6.TP RST.6.TP
RES#7: IC15.9 IC16.9 J23.3 J24.3 RST7.TP RST.7.TP
RES#8: IC17.9 IC18.9 J26.3 J27.3 RST8.TP RST.8.TP
RES#9: IC19.9 IC20.9 J29.3 J30.3 RST9.TP RST.9.TP
RES#10: IC21.9 J32.3 J33.3 RST10.TP RST.10.TP
RES#11: IC22.9 J35.3 J36.3 RST11.TP RST.11.TP
RES#12: IC23.9 J38.3 J39.3 RST12.TP RST.12.TP
RES#13: IC24.9 J41.3 J42.3 RST13.TP RST.13.TP
RES#14: IC25.9 J44.3 J45.3 RST14.TP RST.14.TP
SCL: IC1.10 IC2.10 J2.2 SCL..TP SCL.TP
SCL1: IC3.10 IC4.10 J4.2 SCL1.TP SCL.1.TP
SCL2: IC5.10 IC6.10 J7.2 SCL2.TP SCL.2.TP
SCL3: IC7.10 IC8.10 J10.2 SCL3.TP SCL.3.TP
SCL4: IC9.10 IC10.10 J13.2 SCL4.TP SCL.4.TP
SCL5: IC11.10 IC12.10 J16.2 SCL5.TP SCL.5.TP
SCL6: IC13.10 IC14.10 J19.2 SCL6.TP SCL.6.TP
SCL7: IC15.10 IC16.10 J22.2 SCL7.TP SCL.7.TP
SCL8: IC17.10 IC18.10 J25.2 SCL8.TP SCL.8.TP
SCL9: IC19.10 IC20.10 J28.2 SCL9.TP SCL.9.TP
SCL10: IC21.10 J31.2 SCL10.TP SCL.10.TP
SCL11: IC22.10 J34.2 SCL11.TP SCL.11.TP
SCL12: IC23.10 J37.2 SCL12.TP SCL.12.TP
SCL13: IC24.10 J40.2 SCL13.TP SCL.13.TP
SCL14: IC25.10 J43.2 SCL14.TP SCL.14.TP
SDA: IC1.11 J2.1 SDA..TP SDA.TP
SDA1: IC3.11 J4.1 SDA1.TP SDA.1.TP
SDA2: IC2.11 J2.3 SDA2..TP SDA2.TP
SDA3: IC4.11 J4.3 SDA2.1.TP SDA3.TP
SDA4: IC5.11 J7.1 SDA4.TP SDA.2.TP
SDA5: IC6.11 J7.3 SDA2.2.TP SDA5.TP
SDA6: IC7.11 J10.1 SDA6.TP SDA.3.TP
SDA7: IC8.11 J10.3 SDA2.3.TP SDA7.TP
SDA8: IC9.11 J13.1 SDA8.TP SDA.4.TP
SDA9: IC10.11 J13.3 SDA2.4.TP SDA9.TP
SDA10: IC11.11 J16.1 SDA10.TP SDA.5.TP
SDA11: IC12.11 J16.3 SDA2.5.TP SDA11.TP
SDA12: IC13.11 J19.1 SDA12.TP SDA.6.TP
SDA13: IC14.11 J19.3 SDA2.6.TP SDA13.TP
SDA14: IC15.11 J22.1 SDA14.TP SDA.7.TP
SDA15: IC16.11 J22.3 SDA2.7.TP SDA15.TP
SDA16: IC17.11 J25.1 SDA16.TP SDA.8.TP
SDA17: IC18.11 J25.3 SDA2.8.TP SDA17.TP
SDA18: IC19.11 J28.1 SDA18.TP SDA.9.TP
SDA19: IC20.11 J28.3 SDA2.9.TP SDA19.TP
SDA20: IC21.11 J31.1 SDA20.TP SDA.10.TP
SDA21: IC22.11 J34.1 SDA22.TP SDA.11.TP
SDA22: IC23.11 J37.1 SDA24.TP SDA.12.TP
SDA23: IC24.11 J40.1 SDA26.TP SDA.13.TP
SDA24: IC25.11 J43.1 SDA28.TP SDA.14.TP

## Tracks (layer width: path | path; a pad name or v marks a point on that pad's centre or on a via)
3.3V  (via drill 0.35)
  Top 0.152: 3.3V..TP 12.35,7.02 12.35,5.89 | 6.64,3.96 5.37,5.23 5.37,7.29 5.93,7.86 | 6.64,3.96 7.37,3.96 7.49,4.08 IC1.8 9.81,4.12 12.04,4.12 12.35,4.43 12.35,5.89 | v28.26,3.35 30.13,3.35 C20.1 | v6.64,3.48 6.64,3.96 | IC1.5 12.31,5.94 12.35,5.89
  Top 0.305: 5.93,7.86 6.11,8.03 6.11,8.08 6.46,8.43 3.3V.TP 9.06,14.25 9.42,13.89 9.66,13.89 10.29,13.89 10.75,14.35 10.75,14.63 11.22,15.11 13.17,15.11 13.98,14.29 J3.1
  Bottom 0.152: C10.1 2.64,3.48 2.96,3.8 3.31,3.8 3.81,3.29 5.14,3.29 5.45,2.99 6.15,2.99 v6.64,3.48 6.64,3.8 14.74,3.8 15.21,4.28 19.82,4.28 20.01,4.08 IC2.8 26.17,4.08 | 26.17,4.08 26.81,4.08 26.81,3.79 26.74,3.73 26.74,3.23 27.1,2.88 27.6,2.88 28.08,3.35 v28.26,3.35 | 26.17,4.08 26.17,4.47 26.36,4.66 26.36,5.16 25.58,5.94 IC2.5
3.3V1  (via drill 0.35)
  Top 0.152: 3.3V.1.TP 12.35,24.81 12.35,23.69 | 6.64,21.75 5.37,23.02 5.37,25.08 5.93,25.65 | 6.64,21.75 7.37,21.75 7.49,21.87 IC3.8 9.81,21.91 12.04,21.91 12.35,22.23 12.35,23.69 | v28.26,21.15 30.13,21.15 C15.1 | v6.64,21.27 6.64,21.75 | IC3.5 12.31,23.73 12.35,23.69
  Top 0.305: 5.93,25.65 6.11,25.82 6.11,25.87 6.46,26.23 3.3V1.TP 9.06,32.04 9.42,31.68 9.66,31.68 10.29,31.68 10.75,32.14 10.75,32.42 11.22,32.9 13.17,32.9 13.98,32.08 J6.1
  Bottom 0.152: C5.1 2.64,21.27 2.96,21.59 3.31,21.59 3.81,21.09 5.14,21.09 5.45,20.78 6.15,20.78 v6.64,21.27 6.64,21.59 14.74,21.59 15.21,22.07 19.82,22.07 20.01,21.87 IC4.8 26.17,21.87 | 26.17,21.87 26.81,21.87 26.81,21.59 26.74,21.52 26.74,21.02 27.1,20.67 27.6,20.67 28.08,21.15 v28.26,21.15 | 26.17,21.87 26.17,22.26 26.36,22.45 26.36,22.95 25.58,23.73 IC4.5
3.3V2  (via drill 0.35)
  Top 0.152: 3.3V.2.TP 12.35,42.6 12.35,41.48 | 6.64,39.54 5.37,40.81 5.37,42.87 5.93,43.44 | 6.64,39.54 7.37,39.54 7.49,39.66 IC5.8 9.81,39.7 12.04,39.7 12.35,40.02 12.35,41.48 | v28.26,38.94 30.13,38.94 C30.1 | v6.64,39.06 6.64,39.54 | IC5.5 12.31,41.52 12.35,41.48
  Top 0.305: 5.93,43.44 6.11,43.61 6.11,43.66 6.46,44.02 3.3V2.TP 9.06,49.84 9.42,49.48 9.66,49.48 10.29,49.48 10.75,49.93 10.75,50.21 11.22,50.69 13.17,50.69 13.98,49.88 J9.1
  Bottom 0.152: C17.1 2.64,39.06 2.96,39.38 3.31,39.38 3.81,38.88 5.14,38.88 5.45,38.58 6.15,38.58 v6.64,39.06 6.64,39.38 14.74,39.38 15.21,39.86 19.82,39.86 20.01,39.66 IC6.8 26.17,39.66 | 26.17,39.66 26.81,39.66 26.81,39.38 26.74,39.32 26.74,38.81 27.1,38.46 27.6,38.46 28.08,38.94 v28.26,38.94 | 26.17,39.66 26.17,40.05 26.36,40.24 26.36,40.74 25.58,41.52 IC6.5
3.3V3  (via drill 0.35)
  Top 0.152: 3.3V.3.TP 12.35,60.39 12.35,59.27 | 6.64,57.33 5.37,58.6 5.37,60.67 5.93,61.23 | 6.64,57.33 7.37,57.33 7.49,57.45 IC7.8 9.81,57.49 12.04,57.49 12.35,57.81 12.35,59.27 | v28.26,56.73 30.13,56.73 C40.1 | v6.64,56.86 6.64,57.33 | IC7.5 12.31,59.31 12.35,59.27
  Top 0.305: 5.93,61.23 6.11,61.41 6.11,61.45 6.46,61.81 3.3V3.TP 9.06,67.63 9.42,67.27 9.66,67.27 10.29,67.27 10.75,67.72 10.75,68 11.22,68.48 13.17,68.48 13.98,67.67 J12.1
  Bottom 0.152: C32.1 2.64,56.86 2.96,57.17 3.31,57.17 3.81,56.67 5.14,56.67 5.45,56.37 6.15,56.37 v6.64,56.86 6.64,57.17 14.74,57.17 15.21,57.65 19.82,57.65 20.01,57.45 IC8.8 26.17,57.45 | 26.17,57.45 26.81,57.45 26.81,57.17 26.74,57.11 26.74,56.6 27.1,56.25 27.6,56.25 28.08,56.73 v28.26,56.73 | 26.17,57.45 26.17,57.84 26.36,58.03 26.36,58.54 25.58,59.31 IC8.5
3.3V4  (via drill 0.35)
  Top 0.152: 3.3V.4.TP 12.35,78.19 12.35,77.06 | 6.64,75.12 5.37,76.39 5.37,78.46 5.93,79.02 | 6.64,75.12 7.37,75.12 7.49,75.24 IC9.8 9.81,75.28 12.04,75.28 12.35,75.6 12.35,77.06 | v28.26,74.52 30.13,74.52 C50.1 | v6.64,74.65 6.64,75.12 | IC9.5 12.31,77.1 12.35,77.06
  Top 0.305: 5.93,79.02 6.11,79.2 6.11,79.24 6.46,79.6 3.3V4.TP 9.06,85.42 9.42,85.06 9.66,85.06 10.29,85.06 10.75,85.51 10.75,85.79 11.22,86.27 13.17,86.27 13.98,85.46 J15.1
  Bottom 0.152: C42.1 2.64,74.65 2.96,74.96 3.31,74.96 3.81,74.46 5.14,74.46 5.45,74.16 6.15,74.16 v6.64,74.65 6.64,74.96 14.74,74.96 15.21,75.44 19.82,75.44 20.01,75.24 IC10.8 26.17,75.24 | 26.17,75.24 26.81,75.24 26.81,74.96 26.74,74.9 26.74,74.4 27.1,74.04 27.6,74.04 28.08,74.52 v28.26,74.52 | 26.17,75.24 26.17,75.63 26.36,75.82 26.36,76.33 25.58,77.1 IC10.5
3.3V5  (via drill 0.35)
  Top 0.152: 3.3V.5.TP 45.91,7.02 45.91,5.89 | 40.2,3.96 38.93,5.23 38.93,7.29 39.49,7.86 | 40.2,3.96 40.93,3.96 41.05,4.08 IC11.8 43.37,4.12 45.59,4.12 45.91,4.43 45.91,5.89 | v61.82,3.35 63.69,3.35 C60.1 | v40.2,3.48 40.2,3.96 | IC11.5 45.87,5.94 45.91,5.89
  Top 0.305: 39.49,7.86 39.67,8.03 39.67,8.08 40.02,8.43 3.3V5.TP 42.62,14.25 42.98,13.89 43.21,13.89 43.85,13.89 44.31,14.35 44.31,14.63 44.78,15.11 46.72,15.11 47.54,14.29 J18.1
  Bottom 0.152: C52.1 36.2,3.48 36.51,3.8 36.86,3.8 37.37,3.29 38.7,3.29 39,2.99 39.71,2.99 v40.2,3.48 40.2,3.8 48.29,3.8 48.77,4.28 53.37,4.28 53.57,4.08 IC12.8 59.72,4.08 | 59.72,4.08 60.36,4.08 60.36,3.79 60.3,3.73 60.3,3.23 60.66,2.88 61.16,2.88 61.64,3.35 v61.82,3.35 | 59.72,4.08 59.72,4.47 59.92,4.66 59.92,5.16 59.14,5.94 IC12.5
3.3V6  (via drill 0.35)
  Top 0.152: 3.3V.6.TP 45.91,24.81 45.91,23.69 | 40.2,21.75 38.93,23.02 38.93,25.08 39.49,25.65 | 40.2,21.75 40.93,21.75 41.05,21.87 IC13.8 43.37,21.91 45.59,21.91 45.91,22.23 45.91,23.69 | v61.82,21.15 63.69,21.15 C70.1 | v40.2,21.27 40.2,21.75 | IC13.5 45.87,23.73 45.91,23.69
  Top 0.305: 39.49,25.65 39.67,25.82 39.67,25.87 40.02,26.23 3.3V6.TP 42.62,32.04 42.98,31.68 43.21,31.68 43.85,31.68 44.31,32.14 44.31,32.42 44.78,32.9 46.72,32.9 47.54,32.08 J21.1
  Bottom 0.152: C62.1 36.2,21.27 36.51,21.59 36.86,21.59 37.37,21.09 38.7,21.09 39,20.78 39.71,20.78 v40.2,21.27 40.2,21.59 48.29,21.59 48.77,22.07 53.37,22.07 53.57,21.87 IC14.8 59.72,21.87 | 59.72,21.87 60.36,21.87 60.36,21.59 60.3,21.52 60.3,21.02 60.66,20.67 61.16,20.67 61.64,21.15 v61.82,21.15 | 59.72,21.87 59.72,22.26 59.92,22.45 59.92,22.95 59.14,23.73 IC14.5
3.3V7  (via drill 0.35)
  Top 0.152: 3.3V.7.TP 45.91,42.6 45.91,41.48 | 40.2,39.54 38.93,40.81 38.93,42.87 39.49,43.44 | 40.2,39.54 40.93,39.54 41.05,39.66 IC15.8 43.37,39.7 45.59,39.7 45.91,40.02 45.91,41.48 | v61.82,38.94 63.69,38.94 C80.1 | v40.2,39.06 40.2,39.54 | IC15.5 45.87,41.52 45.91,41.48
  Top 0.305: 39.49,43.44 39.67,43.61 39.67,43.66 40.02,44.02 3.3V7.TP 42.62,49.84 42.98,49.48 43.21,49.48 43.85,49.48 44.31,49.93 44.31,50.21 44.78,50.69 46.72,50.69 47.54,49.88 J24.1
  Bottom 0.152: C72.1 36.2,39.06 36.51,39.38 36.86,39.38 37.37,38.88 38.7,38.88 39,38.58 39.71,38.58 v40.2,39.06 40.2,39.38 48.29,39.38 48.77,39.86 53.37,39.86 53.57,39.66 IC16.8 59.72,39.66 | 59.72,39.66 60.36,39.66 60.36,39.38 60.3,39.32 60.3,38.81 60.66,38.46 61.16,38.46 61.64,38.94 v61.82,38.94 | 59.72,39.66 59.72,40.05 59.92,40.24 59.92,40.74 59.14,41.52 IC16.5
3.3V8  (via drill 0.35)
  Top 0.152: 3.3V.8.TP 45.91,60.39 45.91,59.27 | 40.2,57.33 38.93,58.6 38.93,60.67 39.49,61.23 | 40.2,57.33 40.93,57.33 41.05,57.45 IC17.8 43.37,57.49 45.59,57.49 45.91,57.81 45.91,59.27 | v61.82,56.73 63.69,56.73 C90.1 | v40.2,56.86 40.2,57.33 | IC17.5 45.87,59.31 45.91,59.27
  Top 0.305: 39.49,61.23 39.67,61.41 39.67,61.45 40.02,61.81 3.3V8.TP 42.62,67.63 42.98,67.27 43.21,67.27 43.85,67.27 44.31,67.72 44.31,68 44.78,68.48 46.72,68.48 47.54,67.67 J27.1
  Bottom 0.152: C82.1 36.2,56.86 36.51,57.17 36.86,57.17 37.37,56.67 38.7,56.67 39,56.37 39.71,56.37 v40.2,56.86 40.2,57.17 48.29,57.17 48.77,57.65 53.37,57.65 53.57,57.45 IC18.8 59.72,57.45 | 59.72,57.45 60.36,57.45 60.36,57.17 60.3,57.11 60.3,56.6 60.66,56.25 61.16,56.25 61.64,56.73 v61.82,56.73 | 59.72,57.45 59.72,57.84 59.92,58.03 59.92,58.54 59.14,59.31 IC18.5
3.3V9  (via drill 0.35)
  Top 0.152: 3.3V.9.TP 45.91,78.19 45.91,77.06 | 40.2,75.12 38.93,76.39 38.93,78.46 39.49,79.02 | 40.2,75.12 40.93,75.12 41.05,75.24 IC19.8 43.37,75.28 45.59,75.28 45.91,75.6 45.91,77.06 | v61.82,74.52 63.69,74.52 C100.1 | v40.2,74.65 40.2,75.12 | IC19.5 45.87,77.1 45.91,77.06
  Top 0.305: 39.49,79.02 39.67,79.2 39.67,79.24 40.02,79.6 3.3V9.TP 42.62,85.42 42.98,85.06 43.21,85.06 43.85,85.06 44.31,85.51 44.31,85.79 44.78,86.27 46.72,86.27 47.54,85.46 J30.1
  Bottom 0.152: C92.1 36.2,74.65 36.51,74.96 36.86,74.96 37.37,74.46 38.7,74.46 39,74.16 39.71,74.16 v40.2,74.65 40.2,74.96 48.29,74.96 48.77,75.44 53.37,75.44 53.57,75.24 IC20.8 59.72,75.24 | 59.72,75.24 60.36,75.24 60.36,74.96 60.3,74.9 60.3,74.4 60.66,74.04 61.16,74.04 61.64,74.52 v61.82,74.52 | 59.72,75.24 59.72,75.63 59.92,75.82 59.92,76.33 59.14,77.1 IC20.5
3.3V10
  Top 0.152: 73.58,14.26 3.3V10.TP 75.36,14.22 75.8,13.78 77.7,13.78 77.92,13.99 77.92,14.56 78.35,14.99 80.23,14.99 80.97,14.26 J33.1 | 3.3V.10.TP 80.56,7.27 80.56,5.37 79.61,5.37 78.97,6 77.07,6 IC21.5 76.75,6 73.26,6 73.26,4.1 76.75,4.1 IC21.8 77.07,4.1 78.97,4.1 79.61,3.46 97.07,3.46 C102.1
  Top 0.305: 73.26,6 73.26,6.62 73.21,6.67 73.21,8.19 73.58,8.55 73.58,14.26
3.3V11
  Top 0.152: 73.58,32.05 3.3V11.TP 75.36,32.01 75.8,31.57 77.7,31.57 77.92,31.79 77.92,32.35 78.35,32.79 80.23,32.79 80.97,32.05 J36.1 | 3.3V.11.TP 80.56,25.06 80.56,23.16 79.61,23.16 78.97,23.79 77.07,23.79 IC22.5 76.75,23.79 73.26,23.79 73.26,21.89 76.75,21.89 IC22.8 77.07,21.89 78.97,21.89 79.61,21.25 97.07,21.25 C107.1
  Top 0.305: 73.26,23.79 73.26,24.42 73.21,24.46 73.21,25.98 73.58,26.35 73.58,32.05
3.3V12
  Top 0.152: 73.58,49.84 3.3V12.TP 75.36,49.8 75.8,49.37 77.7,49.37 77.92,49.58 77.92,50.15 78.35,50.58 80.23,50.58 80.97,49.84 J39.1 | 3.3V.12.TP 80.56,42.86 80.56,40.95 79.61,40.95 78.97,41.59 77.07,41.59 IC23.5 76.75,41.59 73.26,41.59 73.26,39.68 76.75,39.68 IC23.8 77.07,39.68 78.97,39.68 79.61,39.05 97.07,39.05 C112.1
  Top 0.305: 73.26,41.59 73.26,42.21 73.21,42.26 73.21,43.78 73.58,44.14 73.58,49.84
3.3V13
  Top 0.152: 73.58,67.64 3.3V13.TP 75.36,67.6 75.8,67.16 77.7,67.16 77.92,67.38 77.92,67.94 78.35,68.37 80.23,68.37 80.97,67.64 J42.1 | 3.3V.13.TP 80.56,60.65 80.56,58.75 79.61,58.75 78.97,59.38 77.07,59.38 IC24.5 76.75,59.38 73.26,59.38 73.26,57.48 76.75,57.48 IC24.8 77.07,57.48 78.97,57.48 79.61,56.84 97.07,56.84 C117.1
  Top 0.305: 73.26,59.38 73.26,60 73.21,60.05 73.21,61.57 73.58,61.93 73.58,67.64
3.3V14
  Top 0.152: 73.58,85.43 3.3V14.TP 75.36,85.39 75.8,84.95 77.7,84.95 77.92,85.17 77.92,85.73 78.35,86.17 80.23,86.17 80.97,85.43 J45.1 | 3.3V.14.TP 80.56,78.44 80.56,76.54 79.61,76.54 78.97,77.17 77.07,77.17 IC25.5 76.75,77.17 73.26,77.17 73.26,75.27 76.75,75.27 IC25.8 77.07,75.27 78.97,75.27 79.61,74.63 97.07,74.63 C122.1
  Top 0.305: 73.26,77.17 73.26,77.8 73.21,77.84 73.21,79.36 73.58,79.73 73.58,85.43
GND  (via drill 0.35)
  Top 0.152: v14.1,4.59 14.1,5.17 14.2,5.35 14.2,6.34 GND..TP | v6.96,4.59 6.99,4.59 7.09,4.7 IC1.7 | v25.75,4.91 27.56,4.91 28.3,4.17 31.86,4.17 31.89,4.13 | 5.21,4.13 v5.21,4.12 | C24.1 31.89,4.13 | 31.89,4.13 31.89,3.37 C20.2 R21.1 C29.2
  Top 0.305: v5.21,8.02 5.21,7.94 4.58,7.31 4.58,4.77 5.21,4.13
  Bottom 0.152: C9.2 0.89,0.94 0.89,2.05 R1.1 0.89,2.21 0.89,3.32 C10.2 0.89,3.48 0.89,4.12 | 0.89,4.12 0.89,4.75 C4.1 | 6.96,4.12 13.63,4.12 v14.1,4.59 14.26,4.75 22.83,4.75 IC2.7 25.75,4.7 v25.75,4.91 | 6.96,4.12 v5.21,4.12 0.89,4.12 | 6.96,4.12 v6.96,4.59
  Bottom 0.305: GND.TP 7,14.57 8.1,15.68 11.33,15.68 12.71,14.29 J1.2 13.29,14.75 13.29,14.93 13.47,15.11 14.73,15.11 14.91,14.93 14.91,14.75 J3.2
  Bottom 0.406: v5.21,8.02 6.3,9.12 GND.TP
GND1  (via drill 0.35)
  Top 0.152: v14.1,22.38 14.1,22.96 14.2,23.14 14.2,24.13 GND.1.TP | v6.96,22.38 6.99,22.38 7.09,22.49 IC3.7 | v25.75,22.7 27.56,22.7 28.3,21.96 31.86,21.96 31.89,21.92 | 5.21,21.92 v5.21,21.91 | C14.1 31.89,21.92 | 31.89,21.92 31.89,21.16 C15.2 R3.1 C13.2
  Top 0.305: v5.21,25.81 5.21,25.73 4.58,25.1 4.58,22.56 5.21,21.92
  Bottom 0.152: C8.2 0.89,18.73 0.89,19.84 R2.1 0.89,20 0.89,21.11 C5.2 0.89,21.27 0.89,21.91 | 0.89,21.91 0.89,22.54 C7.1 | 6.96,21.91 13.63,21.91 v14.1,22.38 14.26,22.54 22.83,22.54 IC4.7 25.75,22.49 v25.75,22.7 | 6.96,21.91 v5.21,21.91 0.89,21.91 | 6.96,21.91 v6.96,22.38
  Bottom 0.305: GND1.TP 7,32.36 8.1,33.47 11.33,33.47 12.71,32.08 J5.2 13.29,32.54 13.29,32.72 13.47,32.9 14.73,32.9 14.91,32.72 14.91,32.54 J6.2
  Bottom 0.406: v5.21,25.81 6.3,26.91 GND1.TP
GND2  (via drill 0.35)
  Top 0.152: v14.1,40.17 14.1,40.75 14.2,40.93 14.2,41.92 GND.2.TP | v6.96,40.18 6.99,40.18 7.09,40.28 IC5.7 | v25.75,40.49 27.56,40.49 28.3,39.75 31.86,39.75 31.89,39.72 | 5.21,39.72 v5.21,39.7 | C28.1 31.89,39.72 | 31.89,39.72 31.89,38.95 C30.2 R5.1 C27.2
  Top 0.305: v5.21,43.6 5.21,43.53 4.58,42.89 4.58,40.35 5.21,39.72
  Bottom 0.152: C23.2 0.89,36.52 0.89,37.64 R4.1 0.89,37.79 0.89,38.91 C17.2 0.89,39.06 0.89,39.7 | 0.89,39.7 0.89,40.33 C19.1 | 6.96,39.7 13.63,39.7 v14.1,40.17 14.26,40.33 22.83,40.33 IC6.7 25.75,40.28 v25.75,40.49 | 6.96,39.7 v5.21,39.7 0.89,39.7 | 6.96,39.7 v6.96,40.18
  Bottom 0.305: GND2.TP 7,50.15 8.1,51.26 11.33,51.26 12.71,49.88 J8.2 13.29,50.33 13.29,50.51 13.47,50.69 14.73,50.69 14.91,50.51 14.91,50.33 J9.2
  Bottom 0.406: v5.21,43.6 6.3,44.7 GND2.TP
GND3  (via drill 0.35)
  Top 0.152: v14.1,57.96 14.1,58.54 14.2,58.72 14.2,59.72 GND.3.TP | v6.96,57.97 6.99,57.97 7.09,58.07 IC7.7 | v25.75,58.28 27.56,58.28 28.3,57.54 31.86,57.54 31.89,57.51 | 5.21,57.51 v5.21,57.49 | C39.1 31.89,57.51 | 31.89,57.51 31.89,56.74 C40.2 R7.1 C38.2
  Top 0.305: v5.21,61.4 5.21,61.32 4.58,60.68 4.58,58.14 5.21,57.51
  Bottom 0.152: C35.2 0.89,54.32 0.89,55.43 R6.1 0.89,55.59 0.89,56.7 C32.2 0.89,56.86 0.89,57.49 | 0.89,57.49 0.89,58.13 C34.1 | 6.96,57.49 13.63,57.49 v14.1,57.96 14.26,58.13 22.83,58.13 IC8.7 25.75,58.07 v25.75,58.28 | 6.96,57.49 v5.21,57.49 0.89,57.49 | 6.96,57.49 v6.96,57.97
  Bottom 0.305: GND3.TP 7,67.94 8.1,69.05 11.33,69.05 12.71,67.67 J11.2 13.29,68.12 13.29,68.3 13.47,68.48 14.73,68.48 14.91,68.3 14.91,68.12 J12.2
  Bottom 0.406: v5.21,61.4 6.3,62.49 GND3.TP
GND4  (via drill 0.35)
  Top 0.152: v14.1,75.76 14.1,76.33 14.2,76.51 14.2,77.51 GND.4.TP | v6.96,75.76 6.99,75.76 7.09,75.86 IC9.7 | v25.75,76.08 27.56,76.08 28.3,75.33 31.86,75.33 31.89,75.3 | 5.21,75.3 v5.21,75.28 | C49.1 31.89,75.3 | 31.89,75.3 31.89,74.54 C50.2 R9.1 C48.2
  Top 0.305: v5.21,79.19 5.21,79.11 4.58,78.47 4.58,75.93 5.21,75.3
  Bottom 0.152: C45.2 0.89,72.11 0.89,73.22 R8.1 0.89,73.38 0.89,74.49 C42.2 0.89,74.65 0.89,75.28 | 0.89,75.28 0.89,75.92 C44.1 | 6.96,75.28 13.63,75.28 v14.1,75.76 14.26,75.92 22.83,75.92 IC10.7 25.75,75.86 v25.75,76.08 | 6.96,75.28 v5.21,75.28 0.89,75.28 | 6.96,75.28 v6.96,75.76
  Bottom 0.305: GND4.TP 7,85.74 8.1,86.84 11.33,86.84 12.71,85.46 J14.2 13.29,85.92 13.29,86.09 13.47,86.27 14.73,86.27 14.91,86.09 14.91,85.92 J15.2
  Bottom 0.406: v5.21,79.19 6.3,80.28 GND4.TP
GND5  (via drill 0.35)
  Top 0.152: v47.66,4.59 47.66,5.17 47.76,5.35 47.76,6.34 GND.5.TP | v40.51,4.59 40.55,4.59 40.65,4.7 IC11.7 | v59.31,4.91 61.12,4.91 61.86,4.17 65.41,4.17 65.45,4.13 | 38.77,4.13 v38.77,4.12 | C59.1 65.45,4.13 | 65.45,4.13 65.45,3.37 C60.2 R11.1 C58.2
  Top 0.305: v38.77,8.02 38.77,7.94 38.13,7.31 38.13,4.77 38.77,4.13
  Bottom 0.152: C55.2 34.45,0.94 34.45,2.05 R10.1 34.45,2.21 34.45,3.32 C52.2 34.45,3.48 34.45,4.12 | 34.45,4.12 34.45,4.75 C54.1 | 40.51,4.12 47.18,4.12 v47.66,4.59 47.82,4.75 56.39,4.75 IC12.7 59.31,4.7 v59.31,4.91 | 40.51,4.12 v38.77,4.12 34.45,4.12 | 40.51,4.12 v40.51,4.59
  Bottom 0.305: GND5.TP 40.55,14.57 41.66,15.68 44.88,15.68 46.27,14.29 J17.2 46.85,14.75 46.85,14.93 47.02,15.11 48.29,15.11 48.47,14.93 48.47,14.75 J18.2
  Bottom 0.406: v38.77,8.02 39.86,9.12 GND5.TP
GND6  (via drill 0.35)
  Top 0.152: v47.66,22.38 47.66,22.96 47.76,23.14 47.76,24.13 GND.6.TP | v40.51,22.38 40.55,22.38 40.65,22.49 IC13.7 | v59.31,22.7 61.12,22.7 61.86,21.96 65.41,21.96 65.45,21.92 | 38.77,21.92 v38.77,21.91 | C69.1 65.45,21.92 | 65.45,21.92 65.45,21.16 C70.2 R13.1 C68.2
  Top 0.305: v38.77,25.81 38.77,25.73 38.13,25.1 38.13,22.56 38.77,21.92
  Bottom 0.152: C65.2 34.45,18.73 34.45,19.84 R12.1 34.45,20 34.45,21.11 C62.2 34.45,21.27 34.45,21.91 | 34.45,21.91 34.45,22.54 C64.1 | 40.51,21.91 47.18,21.91 v47.66,22.38 47.82,22.54 56.39,22.54 IC14.7 59.31,22.49 v59.31,22.7 | 40.51,21.91 v38.77,21.91 34.45,21.91 | 40.51,21.91 v40.51,22.38
  Bottom 0.305: GND6.TP 40.55,32.36 41.66,33.47 44.88,33.47 46.27,32.08 J20.2 46.85,32.54 46.85,32.72 47.02,32.9 48.29,32.9 48.47,32.72 48.47,32.54 J21.2
  Bottom 0.406: v38.77,25.81 39.86,26.91 GND6.TP
GND7  (via drill 0.35)
  Top 0.152: v47.66,40.17 47.66,40.75 47.76,40.93 47.76,41.92 GND.7.TP | v40.51,40.18 40.55,40.18 40.65,40.28 IC15.7 | v59.31,40.49 61.12,40.49 61.86,39.75 65.41,39.75 65.45,39.72 | 38.77,39.72 v38.77,39.7 | C79.1 65.45,39.72 | 65.45,39.72 65.45,38.95 C80.2 R15.1 C78.2
  Top 0.305: v38.77,43.6 38.77,43.53 38.13,42.89 38.13,40.35 38.77,39.72
  Bottom 0.152: C75.2 34.45,36.52 34.45,37.64 R14.1 34.45,37.79 34.45,38.91 C72.2 34.45,39.06 34.45,39.7 | 34.45,39.7 34.45,40.33 C74.1 | 40.51,39.7 47.18,39.7 v47.66,40.17 47.82,40.33 56.39,40.33 IC16.7 59.31,40.28 v59.31,40.49 | 40.51,39.7 v38.77,39.7 34.45,39.7 | 40.51,39.7 v40.51,40.18
  Bottom 0.305: GND7.TP 40.55,50.15 41.66,51.26 44.88,51.26 46.27,49.88 J23.2 46.85,50.33 46.85,50.51 47.02,50.69 48.29,50.69 48.47,50.51 48.47,50.33 J24.2
  Bottom 0.406: v38.77,43.6 39.86,44.7 GND7.TP
GND8  (via drill 0.35)
  Top 0.152: v47.66,57.96 47.66,58.54 47.76,58.72 47.76,59.72 GND.8.TP | v40.51,57.97 40.55,57.97 40.65,58.07 IC17.7 | v59.31,58.28 61.12,58.28 61.86,57.54 65.41,57.54 65.45,57.51 | 38.77,57.51 v38.77,57.49 | C89.1 65.45,57.51 | 65.45,57.51 65.45,56.74 C90.2 R17.1 C88.2
  Top 0.305: v38.77,61.4 38.77,61.32 38.13,60.68 38.13,58.14 38.77,57.51
  Bottom 0.152: C85.2 34.45,54.32 34.45,55.43 R16.1 34.45,55.59 34.45,56.7 C82.2 34.45,56.86 34.45,57.49 | 34.45,57.49 34.45,58.13 C84.1 | 40.51,57.49 47.18,57.49 v47.66,57.96 47.82,58.13 56.39,58.13 IC18.7 59.31,58.07 v59.31,58.28 | 40.51,57.49 v38.77,57.49 34.45,57.49 | 40.51,57.49 v40.51,57.97
  Bottom 0.305: GND8.TP 40.55,67.94 41.66,69.05 44.88,69.05 46.27,67.67 J26.2 46.85,68.12 46.85,68.3 47.02,68.48 48.29,68.48 48.47,68.3 48.47,68.12 J27.2
  Bottom 0.406: v38.77,61.4 39.86,62.49 GND8.TP
GND9  (via drill 0.35)
  Top 0.152: v47.66,75.76 47.66,76.33 47.76,76.51 47.76,77.51 GND.9.TP | v40.51,75.76 40.55,75.76 40.65,75.86 IC19.7 | v59.31,76.08 61.12,76.08 61.86,75.33 65.41,75.33 65.45,75.3 | 38.77,75.3 v38.77,75.28 | C99.1 65.45,75.3 | 65.45,75.3 65.45,74.54 C100.2 R19.1 C98.2
  Top 0.305: v38.77,79.19 38.77,79.11 38.13,78.47 38.13,75.93 38.77,75.3
  Bottom 0.152: C95.2 34.45,72.11 34.45,73.22 R18.1 34.45,73.38 34.45,74.49 C92.2 34.45,74.65 34.45,75.28 | 34.45,75.28 34.45,75.92 C94.1 | 40.51,75.28 47.18,75.28 v47.66,75.76 47.82,75.92 56.39,75.92 IC20.7 59.31,75.86 v59.31,76.08 | 40.51,75.28 v38.77,75.28 34.45,75.28 | 40.51,75.28 v40.51,75.76
  Bottom 0.305: GND9.TP 40.55,85.74 41.66,86.84 44.88,86.84 46.27,85.46 J29.2 46.85,85.92 46.85,86.09 47.02,86.27 48.29,86.27 48.47,86.09 48.47,85.92 J30.2
  Bottom 0.406: v38.77,79.19 39.86,80.28 GND9.TP
GND10  (via drill 0.35)
  Top 0.152: C105.2 98.98,0.92 98.98,1.87 R20.1 98.98,2.19 98.98,3.14 C102.2 98.98,3.46 98.98,4.73 C104.1 98.66,4.73 98.02,4.1 84.05,4.1 83.74,3.78 81.83,3.78 80.88,4.73 | 80.88,4.73 80.88,5.68 82.47,7.27 GND.10.TP | 80.88,4.73 77.07,4.73 IC21.7 76.75,4.73 74.53,4.73 v73.89,5.37
  Top 0.254: v74.68,15.44 81.42,15.44 82.47,14.4 J33.2
  Bottom 0.152: J33.2 82.47,14.32 81.8,14.99 80.59,14.99 79.93,14.32 J32.2
  Bottom 0.254: GND10.TP 74.31,15.44 v74.68,15.44
  Bottom 0.305: v73.89,5.37 73.45,5.81 73.42,5.81 72.75,6.48 72.75,8.38 73.4,9.03 GND10.TP
GND11  (via drill 0.35)
  Top 0.152: C110.2 98.98,18.71 98.98,19.67 R22.1 98.98,19.98 98.98,20.94 C107.2 98.98,21.25 98.98,22.52 C109.1 98.66,22.52 98.02,21.89 84.05,21.89 83.74,21.57 81.83,21.57 80.88,22.52 | 80.88,22.52 80.88,23.48 82.47,25.06 GND.11.TP | 80.88,22.52 77.07,22.52 IC22.7 76.75,22.52 74.53,22.52 v73.89,23.16
  Top 0.254: v74.68,33.24 81.42,33.24 82.47,32.19 J36.2
  Bottom 0.152: J36.2 82.47,32.12 81.8,32.79 80.59,32.79 79.93,32.12 J35.2
  Bottom 0.254: GND11.TP 74.31,33.24 v74.68,33.24
  Bottom 0.305: v73.89,23.16 73.45,23.61 73.42,23.61 72.75,24.27 72.75,26.17 73.4,26.82 GND11.TP
GND12  (via drill 0.35)
  Top 0.152: C115.2 98.98,36.51 98.98,37.46 R23.1 98.98,37.78 98.98,38.73 C112.2 98.98,39.05 98.98,40.32 C114.1 98.66,40.32 98.02,39.68 84.05,39.68 83.74,39.37 81.83,39.37 80.88,40.32 | 80.88,40.32 80.88,41.27 82.47,42.86 GND.12.TP | 80.88,40.32 77.07,40.32 IC23.7 76.75,40.32 74.53,40.32 v73.89,40.95
  Top 0.254: v74.68,51.03 81.42,51.03 82.47,49.98 J39.2
  Bottom 0.152: J39.2 82.47,49.91 81.8,50.58 80.59,50.58 79.93,49.91 J38.2
  Bottom 0.254: GND12.TP 74.31,51.03 v74.68,51.03
  Bottom 0.305: v73.89,40.95 73.45,41.4 73.42,41.4 72.75,42.07 72.75,43.96 73.4,44.61 GND12.TP
GND13  (via drill 0.35)
  Top 0.152: C120.2 98.98,54.3 98.98,55.25 R24.1 98.98,55.57 98.98,56.52 C117.2 98.98,56.84 98.98,58.11 C119.1 98.66,58.11 98.02,57.48 84.05,57.48 83.74,57.16 81.83,57.16 80.88,58.11 | 80.88,58.11 80.88,59.06 82.47,60.65 GND.13.TP | 80.88,58.11 77.07,58.11 IC24.7 76.75,58.11 74.53,58.11 v73.89,58.75
  Top 0.254: v74.68,68.82 81.42,68.82 82.47,67.78 J42.2
  Bottom 0.152: J42.2 82.47,67.71 81.8,68.37 80.59,68.37 79.93,67.71 J41.2
  Bottom 0.254: GND13.TP 74.31,68.82 v74.68,68.82
  Bottom 0.305: v73.89,58.75 73.45,59.19 73.42,59.19 72.75,59.86 72.75,61.76 73.4,62.41 GND13.TP
GND14  (via drill 0.35)
  Top 0.152: C125.2 98.98,72.09 98.98,73.05 R25.1 98.98,73.36 98.98,74.32 C122.2 98.98,74.63 98.98,75.9 C124.1 98.66,75.9 98.02,75.27 84.05,75.27 83.74,74.95 81.83,74.95 80.88,75.9 | 80.88,75.9 80.88,76.86 82.47,78.44 GND.14.TP | 80.88,75.9 77.07,75.9 IC25.7 76.75,75.9 74.53,75.9 v73.89,76.54
  Top 0.254: v74.68,86.62 81.42,86.62 82.47,85.57 J45.2
  Bottom 0.152: J45.2 82.47,85.5 81.8,86.17 80.59,86.17 79.93,85.5 J44.2
  Bottom 0.254: GND14.TP 74.31,86.62 v74.68,86.62
  Bottom 0.305: v73.89,76.54 73.45,76.99 73.42,76.99 72.75,77.65 72.75,79.55 73.4,80.2 GND14.TP
N$1  (via drill 0.35)
  Top 0.152: IC1.12 7.43,1.6 7.33,1.69 7.31,1.69 v6.96,2.05
  Bottom 0.152: v6.96,2.05 2.64,2.05 R1.2
N$2  (via drill 0.35)
  Top 0.152: C21.2 30.17,7.97 27.17,7.97 v26.77,7.56
  Bottom 0.152: IC2.1 25.53,8.42 26.39,7.56 v26.77,7.56
N$3  (via drill 0.35)
  Top 0.152: IC1.1 7.64,8.42 7.62,8.43 7.43,8.43 v6.79,7.8
  Bottom 0.152: v6.79,7.8 6.62,7.62 5.75,7.62 5.5,7.38 4.58,7.38 4.58,7.94 4.4,8.12 2.68,8.12 C1.2
N$4  (via drill 0.35)
  Top 0.152: v6,7.02 6.92,7.02 7.29,7.39 7.29,7.43 7.65,7.8 IC1.2
  Bottom 0.152: C1.1 0.93,7.88 1.66,7.16 3.24,7.16 3.69,6.72 4.27,6.72 4.58,7.02 v6,7.02
N$5  (via drill 0.35)
  Top 0.152: IC1.3 7.51,7.18 6.74,6.41 v6.68,6.41
  Bottom 0.152: v6.68,6.41 2.54,6.41 C2.2
N$6  (via drill 0.35)
  Top 0.152: v6.86,5.5 7.29,5.93 7.29,6.19 7.65,6.56 IC1.4
  Bottom 0.152: C2.1 0.99,6.4 1.8,5.59 3.31,5.59 3.39,5.5 v6.86,5.5
N$7  (via drill 0.35)
  Top 0.152: IC1.14 7.38,0.36 v6.96,0.78
  Bottom 0.152: v6.96,0.78 2.64,0.78 C9.1
N$8  (via drill 0.35)
  Top 0.152: IC1.13 7.62,0.98 7.21,1.39 6.35,1.39 6.16,1.58 6.16,2.34 5.21,3.29 4.13,3.29 3.94,3.48 3.94,4.56 v3.75,4.75
  Bottom 0.152: v3.75,4.75 2.64,4.75 C4.2
N$9  (via drill 0.35)
  Top 0.152: C21.1 31.05,7.15 29.54,7.15 29.21,6.81 v27.3,6.81
  Bottom 0.152: IC2.2 25.67,7.8 26.59,6.88 26.79,6.88 26.86,6.81 v27.3,6.81
N$10  (via drill 0.35)
  Top 0.152: C22.2 30.08,6.31 27.66,6.31 27.44,6.09 26.72,6.09 v26.54,6.27
  Bottom 0.152: IC2.3 25.53,7.18 26.43,6.27 v26.54,6.27
N$11  (via drill 0.35)
  Top 0.152: C22.1 31.16,5.69 27.97,5.69 27.96,5.7 v27.91,5.7